# Altium PCB EtherIOv3_1.PcbDoc (part 1 of 2)
Units mil, origin at the board's own origin, x right, y up, seen from the top; angles counter-clockwise.
Board outline 4380 x 2505 mil, 2 copper layers (Top Layer, Bottom Layer), stack 63.824 mil thick; 108 components, 133 nets, 516 pads, 209 vias.
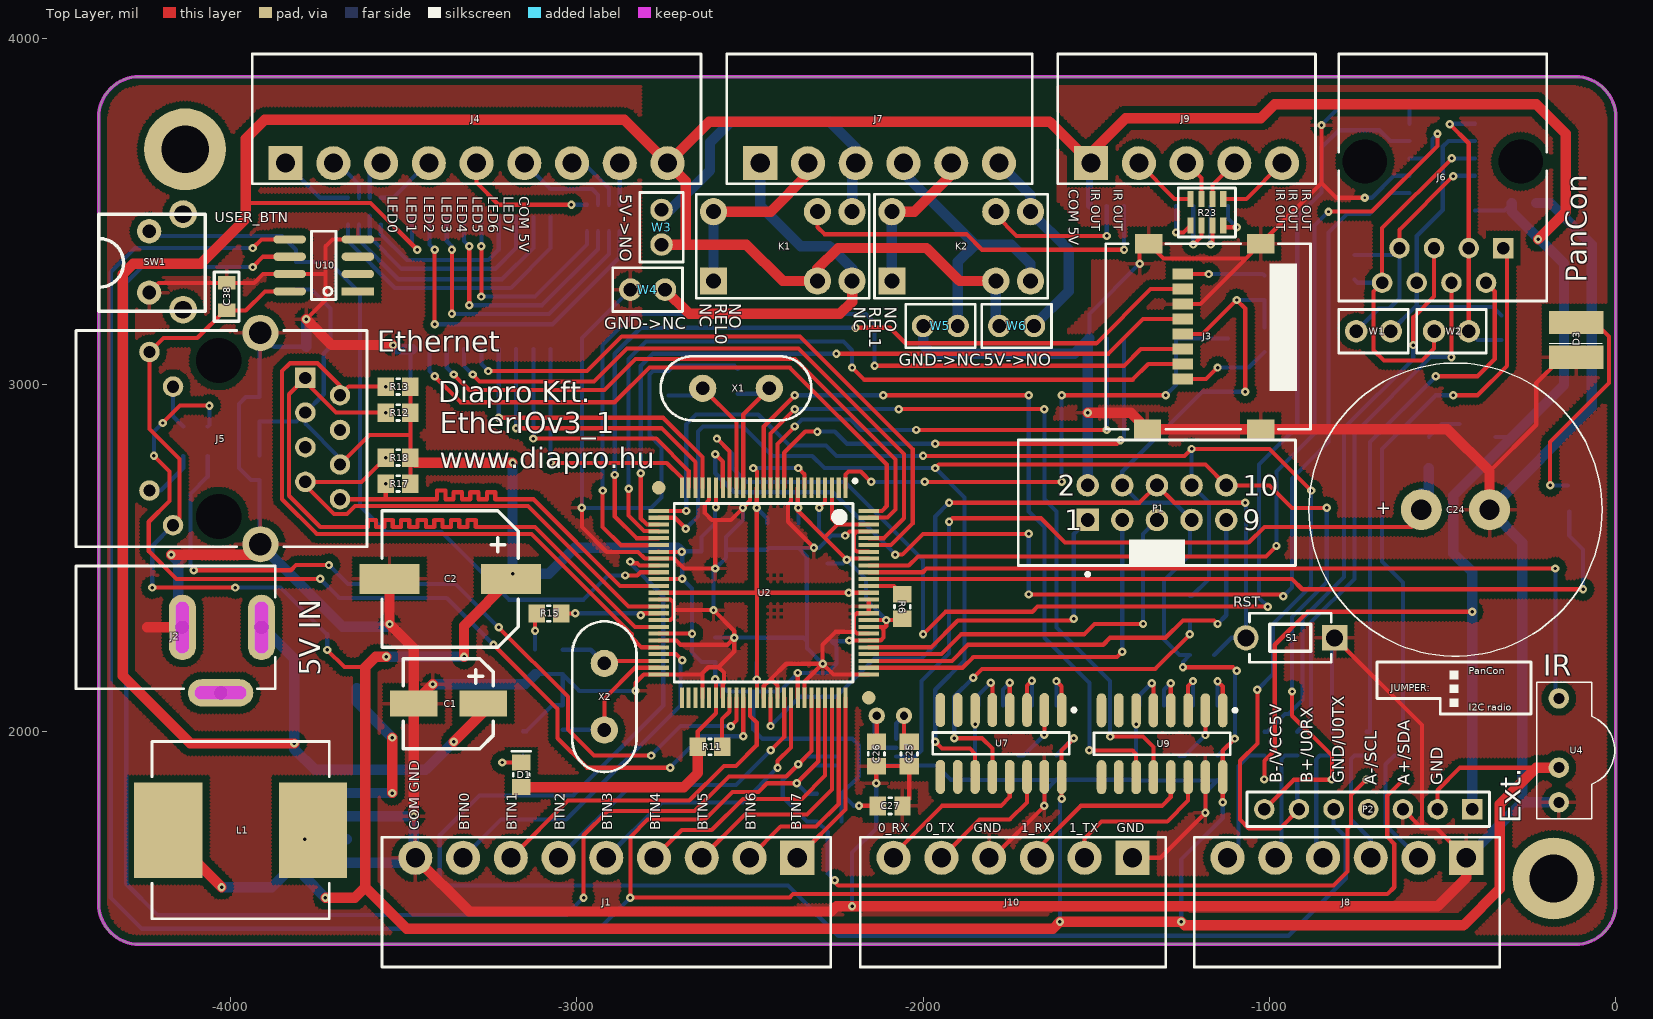
[diagram p0: Top Layer view]
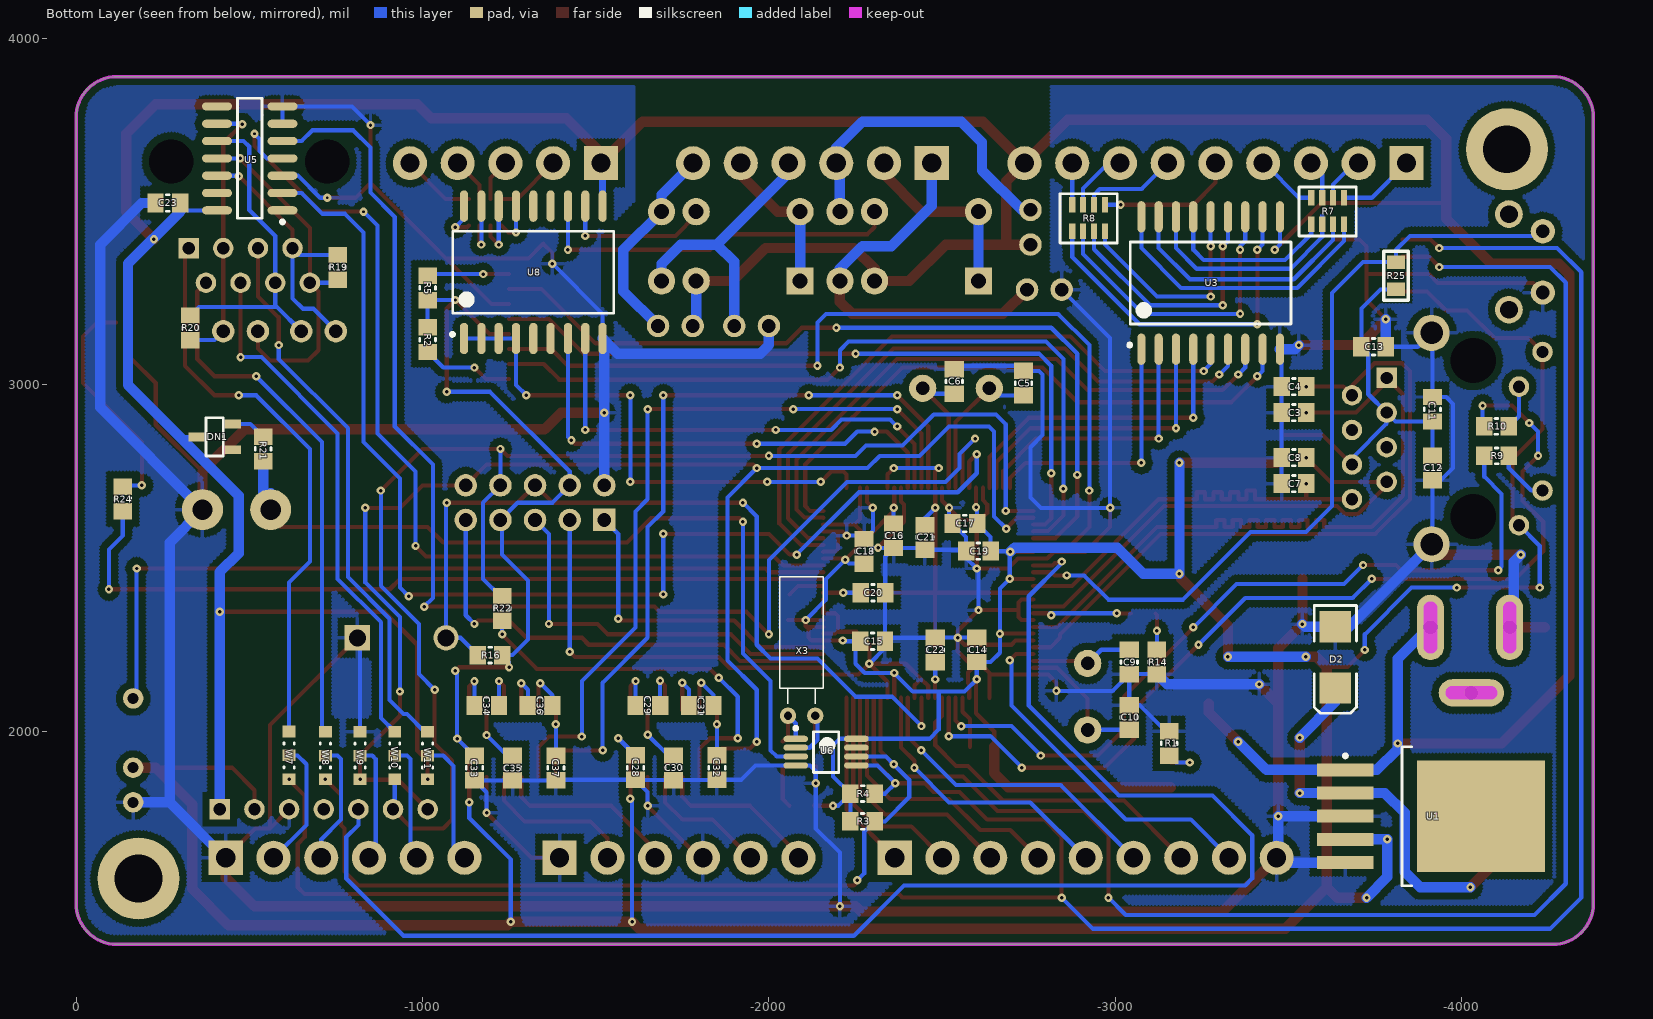
[diagram p1: Bottom Layer view, seen from below]

## Layer stack, top to bottom
Top Layer: signal copper 1.4
Dielectric: core 61.0236, FR-4, Dk 4.8
Bottom Layer: signal copper 1.4

## Board outline
-4380,1503.11 -4380,3771.89 cw(c-4261.89,3771.89) -4261.89,3890 -118.11,3890 cw(c-118.11,3771.89) 0,3771.89 0,1503.11 cw(c-118.11,1503.11) -118.11,1385 -4261.89,1385 cw(c-4261.89,1503.11)

## Design rules (kind name [scope] priority, off if disabled: settings)
Clearance Clearance_to_uc [All vs (InNamedPolygon('BottomLayer-GND'))  or (InNamedPolygon('Top Layer-GND'))] p1: gap=20
Clearance [Not OnLayer('Keep-Out Layer') vs Not OnLayer('Keep-Out Layer')] p2: gap=7
HoleSize [All] p1: absolutevalues=TRUE maxlimit=140 minlimit=1 maxpercent=80.000 minpercent=20.000
MinimumSolderMaskSliver [All] p1: minsoldermaskwidth=1
PolygonConnect [All] p1: connectstyle=Relief reliefconductorwidth=10 reliefentries=4 polygonreliefangle="90 Angle"
RoutingVias [All] p1: holewidth=8 width=24 viastyle="Through Hole" minholewidth=8 minwidth=24 maxholewidth=8 maxwidth=24
SilkscreenOverComponentPads [All] p1: minsilkscreentomaskgap=0
SolderMaskExpansion [All] p1: expansion=4
Width Width_Power [(InNet('NetU1_5') OR InNet('NetU1_18'))] p1: maxlimit=50 minlimit=10 preferedwidth=25
Width [All] p2: maxlimit=30 minlimit=8 preferedwidth=12
25 further rules are at their usual default settings.

## Classes and differential pairs
component class EtherIOv3_1: C1 C2 C3 C4 C5 C6 C7 C8 C9 C10 C11 C12 C13 C14 C15 C16 C17 C18 C19 C20 C21 C22 C38 D1 D2 D3 J1 J2 J3 J4 J5 L1 P1 R1 R2 R3 R4 R5 R6 R7 R8 R9 R10 R11 R12 R13 R14 R15 R16 R17 R18 R24 R25 S1 SW1 U1 U2 U3 U4 U10 X1 X2

## Components (designator, comment, footprint, x,y, rotation, side; value= is the part's Value field where it differs from the comment)
C1 "100uF_25V" "ELECTROLIT CAP F80" -3370,2080 r0 top
C2 "1000uF_6V3" "ELECTROLIT CAP J10" -3365,2440 r0 top
C3 "CAP" "0805 CAP" -3515.43,2920 r0 bottom
C4 "CAP" "0805 CAP" -3515.43,2995 r0 bottom
C5 "CAP" "0805 CAP" -2735,3005 r270 bottom
C6 "CAP" "0805 CAP" -2535,3010 r270 bottom
C7 "CAP" "0805 CAP" -3515.43,2715 r0 bottom
C8 "CAP" "0805 CAP" -3515.43,2790 r0 bottom
C9 "CAP" "0805 CAP" -3040,2200 r90 bottom
C10 "CAP" "0805 CAP" -3040,2040 r270 bottom
C11 "CAP" "0805 CAP" -3915,2929.57 r270 bottom
C12 "CAP" "0805 CAP" -3915,2760.43 r270 bottom
C13 "CAP" "0805 CAP" -3745.43,3110 r180 bottom
C14 "CAP" "0805 CAP" -2600,2235.43 r270 bottom
C15 "CAP" "0805 CAP" -2299.57,2260 r0 bottom
C16 "CAP" "0805 CAP" -2360,2564.57 r90 bottom
C17 "CAP" "0805 CAP" -2565.43,2600 r180 bottom
C18 "CAP" "0805 CAP" -2275,2519.57 r270 bottom
C19 "CAP" "0805 CAP" -2604.57,2520 r180 bottom
C20 "CAP" "0805 CAP" -2300.43,2400 r0 bottom
C21 "CAP" "0805 CAP" -2450,2559.57 r90 bottom
C22 "CAP" "0805 CAP" -2480,2234.57 r270 bottom
C23 "CAP" "0805 CAP" -265,3525 r0 bottom
C24 "ELKO" Goldcap_1F -463.43,2640 r180 top
C25 "CAP" "0805 CAP" -2040,1935 r90 top
C26 "CAP" "0805 CAP" -2135,1935 r90 top
C27 "CAP" "0805 CAP" -2095,1785 r0 top
C28 "CAP" "0805 CAP" -1615,1895.43 r270 bottom
C29 "CAP" "0805 CAP" -1650.43,2075 r0 bottom
C30 "CAP" "0805 CAP" -1725,1894.57 r270 bottom
C31 "CAP" "0805 CAP" -1804.57,2075 r180 bottom
C32 "CAP" "0805 CAP" -1850,1895.43 r270 bottom
C33 "CAP" "0805 CAP" -1150,1894.57 r270 bottom
C34 "CAP" "0805 CAP" -1185.43,2074.13 r0 bottom
C35 "CAP" "0805 CAP" -1260,1893.7 r270 bottom
C36 "CAP" "0805 CAP" -1339.57,2074.13 r180 bottom
C37 "CAP" "0805 CAP" -1385,1894.57 r270 bottom
C38 "100nF" FP_0805_CAP_125 -4010,3255 r90 top
D1 "PWR" "0805 LED" -3160,1874.57 r90 top
D2 "D Schottky" DSO-C2/X2.3 -3635,2213.58 r270 bottom
D3 "LED_RED" "Osram sideled" -115,3130 r90 top
DN1 "BAR43S" DIODE_SOT23_serial -400,2850 r180 bottom
J1 "BUTTONS" "Euroblock 3.5pitch 9P" -2363.23,1634.96 r180 top
J2 "PWR2.5" KLD-0202 -4445,2300 r0 top
J3 "MicroSD" microSD -1250,3016.69 r90 top
J4 "LEDS" "Euroblock 3.5pitch 9P" -3840,3640 r0 top
J5 "EthernetConnector" LU1T516-43 -4355,2845 r90 top
J6 "RJ45-PanBeam" JACK1.27-2H8B -500,3955 r180 top
J7 "Relays" "Euroblock 3.5pitch 6P" -2470,3640 r0 top
J8 "PB audio IN/Extension" "Euroblock 3.5pitch 6P" -432.2,1635 r180 top
J9 "Infra OUT" "Euroblock 3.5pitch 5P" -1515,3640 r0 top
J10 "RS232" "Euroblock 3.5pitch 6P" -1396.02,1635 r180 top
K1 "REL0" RSY-12 -2405,3300 r90 top
K2 "REL1" RSY-12 -1890,3300 r90 top
L1 "100uH" INDP127127X85N -3970,1715 r0 top
P1 "Header 5X2" IDC2.54-V10D -1325,2660 r0 top
P2 "Extension" HDR1X7 -415,1775 r180 top
R1 "RES" "0805 RES" -3155,1965 r270 bottom
R2 "RES" "0805 RES" -1015,3130.43 r90 bottom
R3 "RES" "0805 RES" -2270.43,1740 r0 bottom
R4 "RES" "0805 RES" -2270.43,1820 r0 bottom
R5 "RES" "0805 RES" -1015,3280 r270 bottom
R6 "RES" "0805 RES" -2060,2360 r270 top
R7 "4x Res Array" "1206 4XRES ARRAY" -3660,3540 r0 bottom
R8 "4x Res Array" "1206 4XRES ARRAY" -2970,3520 r0 bottom
R9 "RES" "0805 RES" -4100.43,2795 r180 bottom
R10 "RES" "0805 RES" -4100,2880 r180 bottom
R11 "RES" "0805 RES" -2615,1955 r180 top
R12 "RES" "0805 RES" -3515.43,2920 r0 top
R13 "RES" "0805 RES" -3515.43,2995 r0 top
R14 "RES" "0805 RES" -3120,2200.43 r90 bottom
R15 "RES" "0805 RES" -3080,2340 r0 top
R16 "RES" "0805 RES" -1195,2220 r180 bottom
R17 "RES" "0805 RES" -3515.43,2715 r0 top
R18 "RES" "0805 RES" -3515.43,2790 r0 top
R19 "RES" "0805 RES" -755,3339.33 r90 bottom
R20 "RES" "0805 RES" -330,3164.76 r90 bottom
R21 "RES" "0805 RES" -540,2815 r270 bottom
R22 "RES" "0805 RES" -1230,2355 r270 bottom
R23 "4x Res Array" "1206 4xRES ARRAY" -1133.5,3536.77 r180 top
R24 "RES" "0805 RES" -135,2670.43 r270 bottom
R25 "10k" FP_0805_RES -3810,3315 r90 bottom
S1 "SW-PB" SPST-2 -940,2270 r180 top
SW1 "SW_tactile_2pin" "BUTTON_6X6 90deg" -4185,3355 r270 top
U1 "TS2576" TO-263-5L -3910,1755 r180 bottom
U2 "LM3S6911-IQC" QFP50P1600X1600X160-100N -2460,2400 r270 top
U3 "ULN2803A" SOIC127P1030X265-18N -3275,3294.06 r90 bottom
U4 "TSOP1736" TSOP17xx -165,1945 r90 top
U5 "MAX491ESD" NSO14_N -501.38,3653.82 r0 bottom
U6 "MCP79411" MSOP8 -2165,1940 r180 bottom
U7 "MAX3232CSE" NSO16_M -1775,1965 r270 top
U8 "ULN2803A" SOIC127P1030X265-18N -1320,3325 r90 bottom
U9 "MAX3232CSE" NSO16_M -1310,1964.13 r270 top
U10 "MB85RC16PNF" DIGITAL_SOIC8 -3730,3345 r180 top
W1 "Jumper" Jumper -700,3154.76 r180 top
W2 "Jumper" Jumper -475,3154.76 r180 top
W3 "Jumper" JUMPER -2755,3455 r270 top
W4 "Jumper" JUMPER -2795,3275 r180 top
W5 "Jumper" JUMPER -1950,3170 r180 top
W6 "Jumper" JUMPER -1730,3170 r180 top
W7 "A+/SDA" "0603 3WAY JUMPER" -615,1965 r270 bottom (schematic designator W11)
W8 "A-/SCL" "0603 3WAY JUMPER" -720,1964.45 r270 bottom
W9 "GND/U0TX" "0603 3WAY JUMPER" -820,1964.45 r270 bottom
W10 "B+/U0RX" "0603 3WAY JUMPER" -920,1964.45 r270 bottom
W11 "B-/VCC5V" "0603 3WAY JUMPER" -1015,1964.45 r270 bottom
X1 "CRYSTAL" CRYSTAL_LOW -2540,2990 r0 top
X2 "CRYSTAL" CRYSTAL_LOW -2920,2100 r270 top
X3 "CRYSTAL" CRYSTAL_MINI -2094.37,2045 r180 bottom

## Footprints (in the part's own frame and the unit in brackets; to place one, negate y for a bottom-side part, rotate by r counter-clockwise, add the part's x,y. Pads: shape width x height; smd on the part's side, far side on the other; paste and mask are expansions set on the pad)
"0603 3WAY JUMPER" [mm] "Chip Resistor, 2-Leads, Body 1,6x0,8mm, IPC Medium Density"
  rect 0.85x0.95 smd: 1(-0.875,0) 2(0.875,0) 3(2.625,0)
  silkscreen extent -0.05,-0.38 1.8,0.38, body extent -0.8,-0.45 2.5,0.45, height 0.55
"0805 CAP" [mm] "Chip Capacitor, 2-Leads, Body 2,0x1,3mm, IPC Medium Density"
  rect 1.2x1.4 smd: 1(-0.9,0) 2(0.9,0)
  silkscreen extent -0.1,-0.6 0.1,0.6, body extent -1.05,-0.67 1.05,0.67, height 1
"0805 LED" [mm] "SMD LED, 2-Leads, Body 2,0x1,3mm, IPC Medium Density"
  rect 1.2x1.35 smd: 1(-0.9,0) 2(0.9,0)
  silkscreen extent -0.1,-0.7 1.73,0.7, body extent -1.05,-0.67 1.05,0.67, height 1
"0805 RES" [mm] "Chip Resistor, 2-Leads, Body 2,0x1,3mm, IPC Medium Density"
  rect 1.2x1.35 smd: 1(-0.9,0) 2(0.9,0)
  silkscreen extent -0.1,-0.58 0.1,0.58, body extent -1.05,-0.67 1.05,0.67, height 1
"1206 4XRES ARRAY" [mm] "Chip Resistor, 2-Leads, Body 3,2x1,6mm, IPC Medium Density"
  rect 0.45x1.15 smd: 1(0,0) 2(0.8,0) 3(1.6,0) 4(2.4,0) 5(2.4,1.95) 6(1.6,1.95) 7(0.8,1.95) 8(0,1.95)
  silkscreen extent -0.9,-0.8 3.3,2.8, body extent -0.6,-0.3 3,2.3, height 0.6
"1206 4xRES ARRAY" [mm] "Chip Resistor, 2-Leads, Body 3,2x1,6mm, IPC Medium Density"
  rect 0.45x1.15 smd: 1(0,0) 2(0.8,0) 3(1.6,0) 4(2.4,0) 5(2.4,1.95) 6(1.6,1.95) 7(0.8,1.95) 8(0,1.95)
  silkscreen extent -0.9,-0.8 3.3,2.8, body extent -0.6,-0.3 3,2.3, height 0.6
"BUTTON_6X6 90deg" [mil]
  round 70 hole 39.37: 1(88.5,-49) 2(-88.5,-49)
  round 80 hole 51: 3(-138,49) 3(138,49)
  silkscreen extent -137,-195 143,112, body extent -168,-199 171,110, height 287
CRYSTAL_LOW [mm]
  round 2 hole 1: 1(-2.44,0) 2(2.44,0)
  silkscreen extent -5.53,-2.35 5.53,2.35, body extent -5.6,-2.4 5.6,2.4, height 3.7
CRYSTAL_MINI [mm] "Furatszerelt D-3.1x8.2"
  round 1.2 hole 0.6: 1(-1,0) 2(1,0)
  silkscreen extent -1.6,0.89 1.6,10.2, body extent -1.5,2.1 1.49,10.1, height 3
DIGITAL_SOIC8 [mm]
  rect 2.4x0.6 smd: 1(-2.5,1.905)
  oval 2.4x0.6 smd: 2(-2.5,0.635) 3(-2.5,-0.635) 4(-2.5,-1.905) 5(2.5,-1.905) 6(2.5,-0.635) 7(2.5,0.635) 8(2.5,1.905)
  silkscreen extent -0.9,-2.5 0.9,2.5, body extent -3.03,-2.5 3.03,2.5, height 1.9
DIODE_SOT23_serial [mm] "SOT23-3 tok"
  rect 1.2x0.65 smd: A(1.327,-0.95) COM(-1.327,0) K(1.327,0.95)
  silkscreen extent -0.64,-1.4 0.64,1.4, body extent -1.27,-1.46 1.27,1.46, height 0.97
DSO-C2/X2.3 [mm] "DO-214-AA/SMB; 2 C-Bend Leads; Body 5.3 x 3.6 mm, inc. leads (LxW)"
  rect 2.3x2.3 smd: 1(-2.25,0) 2(2.25,0)
  silkscreen extent -3.8,-1.55 4.1,1.55
"ELECTROLIT CAP F80" [mm]
  rect 3.5x1.9 smd: 1(-2.55,0) 2(2.55,0)
  silkscreen extent -3.3,-3.3 3.3,3.3, body extent -3.3,-3.3 3.3,3.3, height 7.6
"ELECTROLIT CAP J10" [mm]
  rect 4.4x2.2 smd: 1(-4.45,0) 2(4.45,0)
  silkscreen extent -5,-5 5,5, body extent -5,-5 5,5, height 10
"Euroblock 3.5pitch 5P" [mm] "3.5 mm pitch 5P connector"
  rect 2.5x2.5 hole 1.4: 1(0,0)
  round 2.5 hole 1.4 mask+0.102: 2(3.5,0) 3(7,0) 4(10.5,0) 5(14,0)
  silkscreen extent -2.45,-1.5 16.45,8, body extent -2.45,-1.5 16.45,8, height 7.2
"Euroblock 3.5pitch 6P" [mm] "3.5 mm pitch 6P connector"
  rect 2.5x2.5 hole 1.4: 1(0,0)
  round 2.5 hole 1.4 mask+0.102: 2(3.5,0) 3(7,0) 4(10.5,0) 5(14,0) 6(17.5,0)
  silkscreen extent -2.45,-1.5 19.95,8, body extent -2.45,-1.5 19.95,8, height 7.2
"Euroblock 3.5pitch 9P" [mm] "3.5 mm pitch 9P connector"
  rect 2.5x2.5 hole 1.4: 1(0,0)
  round 2.5 hole 1.4 mask+0.102: 2(3.5,0) 3(7,0) 4(10.5,0) 5(14,0) 6(17.5,0) 7(21,0) 8(24.5,0) 9(28,0)
  silkscreen extent -2.45,-1.5 30.45,8, body extent -2.45,-1.5 30.45,8, height 7.2
FP_0805_CAP_125 [mm] "0805 kapacitás YAGEO/NIC 1.25 mm magas"
  rect 1x1.3 smd: 1(-1,0) 2(1,0)
  silkscreen extent -1.8,-0.9 1.8,0.9, body extent -1,-0.64 1.03,0.64, height 1.25
FP_0805_RES [mm] "0805 ellenállás"
  rect 1x1.3 smd: 1(-1,0) 2(1,0)
  silkscreen extent -1.8,-0.9 1.8,0.9, body extent -1,-0.62 1,0.63, height 0.62
Goldcap_1F [mm] "Goldcap 1F 21.5x8mm"
  round 3 hole 1.5: 1(-2.5,0) 2(2.5,0)
  silkscreen extent -10.75,-10.75 10.75,10.75, body extent -10.72,-10.7 10.7,10.76, height 8
HDR1X7 [mm] "Connector; Header; 7 Position"
  rect 1.5x1.5 hole 0.9: 1(0,0)
  round 1.5 hole 0.9: 2(2.54,0) 3(5.08,0) 4(7.62,0) 5(10.16,0) 6(12.7,0) 7(15.24,0)
  silkscreen extent -1.27,-1.27 16.51,1.27
IDC2.54-V10D [mm] "Connector; IDC, Low Profile Male Header, Thru-Hole; 10 Position; Vertical; Pitch 2.54 mm; Body 20.32 x 9.2 x 9.45 mm (LxWxH)"
  rect 1.65x1.65 hole 1: 1(-5.08,-1.27)
  round 1.65 hole 1: 2(-5.08,1.27) 3(-2.54,-1.27) 4(-2.54,1.27) 5(0,-1.27) 6(0,1.27) 7(2.54,-1.27) 8(2.54,1.27) 9(5.08,-1.27) 10(5.08,1.27)
  silkscreen extent -10.16,-5.37 10.16,4.6, body extent -10.16,-4.6 10.16,4.6, height 9.45
INDP127127X85N [mm] "Precision Wire Wound Inductor, 2-Leads, Body 12,7x12,7mm, IPC Medium Density"
  rect 5x7 smd: 1(-5.3,0) 2(5.3,0)
  silkscreen extent -6.5,-6.5 6.5,6.5, body extent -6.5,-6.5 6.5,6.5, height 8.5
JACK1.27-2H8B [mm] "Connector; PCB Jack, Thru-Hole; 1-Port, 8 Positions, 8 Loaded; Unshielded without Lightpipes; Right Angle"
  rect 1.5x1.5 hole 0.9: 1(-4.445,14.23)
  round 1.5 hole 0.9: 2(-3.175,16.77) 3(-1.905,14.23) 4(-0.635,16.77) 5(0.635,14.23) 6(1.905,16.77) 7(3.175,14.23) 8(4.445,16.77)
  round 2.95 hole 3.25 unplated: MH1(-5.715,7.88) MH2(5.715,7.88)
  silkscreen extent -7.62,0 7.62,18.1, body extent -7.62,0 7.62,18.1, height 8.65
Jumper [mm] "Jumper, 2.54 pitch"
  round 1.65 hole 1: 1(-1.27,0) 2(1.27,0)
  silkscreen extent -2.55,-1.6 2.55,1.6, body extent -2.54,-1.6 2.54,1.6, height 8.54
JUMPER [mm] "Jumper, 2.54 pitch"
  round 1.65 hole 1: 1(-1.27,0) 2(1.27,0)
  silkscreen extent -2.55,-1.6 2.55,1.6, body extent -2.54,-1.6 2.54,1.6, height 8.54
KLD-0202 [mm] "DC Power Jack, 2.5mm, KLD Series, PCB Mount"
  oval 2x4.8 hole 1: 1(13.6,0) 2(7.8,0)
  oval 4.8x2 hole 1: 3(10.6,-4.8)
  Keep-Out Layer lines w1: 7.8,-1.4 7.8,1.4 ; 9.2,-4.8 12,-4.8 ; 13.6,-1.4 13.6,1.4
  silkscreen extent 0,-4.5 14.6,4.5, body extent 0,-4.5 14.6,4.5, height 10.7
LU1T516-43 [mm] "Connector; PCB Jack, Thru-Hole; 1-Port, 8 Positions, 8 Loaded; Shielded without Lightpipes; Right Angle"
  round 2.65 hole 1.651: MH1(7.747,-11.227) MH2(-7.747,-11.227)
  round 2.95 hole 3.302 unplated: MH3(5.715,-8.179) MH4(-5.715,-8.179)
  rect 1.5x1.5 hole 0.9: P1(4.445,-14.529)
  round 1.5 hole 0.9: P2(3.175,-17.069) P3(1.905,-14.529) P4(0.635,-17.069) P5(-0.635,-14.529) P6(-1.905,-17.069) P7(-3.175,-14.529) P8(-4.445,-17.069) P9(6.35,-3.099) P10(3.81,-4.826) P11(-3.81,-3.099) P12(-6.35,-4.826)
  silkscreen extent -7.92,-19.05 7.92,2.29, body extent -7.87,-19.05 7.87,2.29, height 12.09
microSD [mm]
  rect 0.8x1.5 smd: 1(0,0) 2(1.1,0) 3(2.2,0) 4(3.3,0) 5(4.4,0) 6(5.5,0) 7(6.6,0) 8(7.7,0)
  rect 1.45x2 smd: 9(-3.675,2.6) 10(9.925,2.5) 11(-3.675,-5.7) 12(9.925,-5.7)
  Top Overlay keep-out region: -0.888,-8.349 8.462,-8.349 8.462,-6.349 -0.888,-6.349
  silkscreen extent -3.67,-9.35 9.92,5.65
MSOP8 [mm] "MSOP, 8-Leads, Body 3,0x3,0mm (max), Pitch 0,65mm, IPC Medium Density"
  oval 1.8x0.45 smd: 1(-2.225,0.975) 2(-2.225,0.325) 3(-2.225,-0.325) 4(-2.225,-0.975) 5(2.225,-0.975) 6(2.225,-0.325) 7(2.225,0.325) 8(2.225,0.975)
  silkscreen extent -2.35,-1.5 0.92,1.87, body extent -1.52,-1.53 1.53,1.52, height 1.1
NSO14_N [mm] "SOIC, 14-Leads, Body 8.7x3.9mm, Pitch 1.27mm, IPC Medium Density"
  oval 2.2x0.6 smd: 1(-2.4,3.81) 2(-2.4,2.54) 3(-2.4,1.27) 4(-2.4,0) 5(-2.4,-1.27) 6(-2.4,-2.54) 7(-2.4,-3.81) 8(2.4,-3.81) 9(2.4,-2.54) 10(2.4,-1.27) 11(2.4,0) 12(2.4,1.27) 13(2.4,2.54) 14(2.4,3.81)
  silkscreen extent -2.52,-4.4 0.9,4.78, body extent -2,-4.38 2,4.38, height 1.75
NSO16_M [mm] "SOIC, 16-Leads, Body 9.9x3.9mm, Pitch 1.27mm, IPC Low Density"
  oval 2.5x0.7 smd: 1(-2.45,4.445) 2(-2.45,3.175) 3(-2.45,1.905) 4(-2.45,0.635) 5(-2.45,-0.635) 6(-2.45,-1.905) 7(-2.45,-3.175) 8(-2.45,-4.445) 9(2.45,-4.445) 10(2.45,-3.175) 11(2.45,-1.905) 12(2.45,-0.635) 13(2.45,0.635) 14(2.45,1.905) 15(2.45,3.175) 16(2.45,4.445)
  silkscreen extent -2.57,-5 0.8,5.47, body extent -2,-5 2,5, height 1.75
"Osram sideled" [mil]
  rect 67x157.48 smd paste+0: A(50,0)
  rect 67x157.48 smd: K(-50,0)
  silkscreen extent -10,-76 -10,78, body extent -77,-79 81,69, height 158
QFP50P1600X1600X160-100N [mm] "QFP,0.50mm pitch,square;25 pin X 25 pin,14.00mm X 14.00mm X 1.60mm H body"
  rect 1.5x0.3 smd: 1(-7.7,6) 2(-7.7,5.5) 3(-7.7,5) 4(-7.7,4.5) 5(-7.7,4) 6(-7.7,3.5) 7(-7.7,3) 8(-7.7,2.5) 9(-7.7,2) 10(-7.7,1.5) 11(-7.7,1) 12(-7.7,0.5) 13(-7.7,0) 14(-7.7,-0.5) 15(-7.7,-1) 16(-7.7,-1.5) 17(-7.7,-2) 18(-7.7,-2.5) 19(-7.7,-3) 20(-7.7,-3.5) 21(-7.7,-4) 22(-7.7,-4.5) 23(-7.7,-5) 24(-7.7,-5.5) 25(-7.7,-6) 51(7.7,-6) 52(7.7,-5.5) 53(7.7,-5) 54(7.7,-4.5) 55(7.7,-4) 56(7.7,-3.5) 57(7.7,-3) 58(7.7,-2.5) 59(7.7,-2) 60(7.7,-1.5) 61(7.7,-1) 62(7.7,-0.5) 63(7.7,0) 64(7.7,0.5) 65(7.7,1) 66(7.7,1.5) 67(7.7,2) 68(7.7,2.5) 69(7.7,3) 70(7.7,3.5) 71(7.7,4) 72(7.7,4.5) 73(7.7,5) 74(7.7,5.5) 75(7.7,6)
  rect 0.3x1.5 smd: 26(-6,-7.7) 27(-5.5,-7.7) 28(-5,-7.7) 29(-4.5,-7.7) 30(-4,-7.7) 31(-3.5,-7.7) 32(-3,-7.7) 33(-2.5,-7.7) 34(-2,-7.7) 35(-1.5,-7.7) 36(-1,-7.7) 37(-0.5,-7.7) 38(0,-7.7) 39(0.5,-7.7) 40(1,-7.7) 41(1.5,-7.7) 42(2,-7.7) 43(2.5,-7.7) 44(3,-7.7) 45(3.5,-7.7) 46(4,-7.7) 47(4.5,-7.7) 48(5,-7.7) 49(5.5,-7.7) 50(6,-7.7) 76(6,7.7) 77(5.5,7.7) 78(5,7.7) 79(4.5,7.7) 80(4,7.7) 81(3.5,7.7) 82(3,7.7) 83(2.5,7.7) 84(2,7.7) 85(1.5,7.7) 86(1,7.7) 87(0.5,7.7) 88(0,7.7) 89(-0.5,7.7) 90(-1,7.7) 91(-1.5,7.7) 92(-2,7.7) 93(-2.5,7.7) 94(-3,7.7) 95(-3.5,7.7) 96(-4,7.7) 97(-4.5,7.7) 98(-5,7.7) 99(-5.5,7.7) 100(-6,7.7)
  round 1 smd: 101(-7.7,-7.7) 102(7.7,7.7)
  Top Layer pour cut-out: 154 vertices and 0 holes, not listed, extent -8.7,-8.7 -6.7,-6.7
  Top Layer pour cut-out: 154 vertices and 0 holes, not listed, extent 6.7,6.7 8.7,8.7
  silkscreen extent -8.32,-6.55 6.55,6.83
RSY-12 [mm]
  round 2 hole 1.1: COIL1(0,-2.54) COIL2(5.08,-2.54) COM2(5.08,5.08) NC(0,-5.08) NO(5.08,-5.08)
  rect 2x2 hole 1.1: COM1(0,5.08)
  silkscreen extent -1.27,-6.35 6.35,6.35, body extent -1.27,-6.35 6.35,6.35, height 10.2
SOIC127P1030X265-18N [mm] "SOIC, 18-Leads, Body 11,8x7,6mm (max), Pitch 1,27mm, IPC Medium Density"
  oval 2.3x0.6 smd: 1(-4.85,5.08) 2(-4.85,3.81) 3(-4.85,2.54) 4(-4.85,1.27) 5(-4.85,0) 6(-4.85,-1.27) 7(-4.85,-2.54) 8(-4.85,-3.81) 9(-4.85,-5.08) 10(4.85,-5.08) 11(4.85,-3.81) 12(4.85,-2.54) 13(4.85,-1.27) 14(4.85,0) 15(4.85,1.27) 16(4.85,2.54) 17(4.85,3.81) 18(4.85,5.08)
  silkscreen extent -4.67,-5.9 3,6.06, body extent -3.8,-5.87 3.8,5.87, height 2.65
SPST-2 [mm] "Circuit Breaker; 2 Leads"
  rect 1.85x1.85 hole 1.25: 1(-3.25,0)
  round 1.85 hole 1.25: 2(3.25,0)
  silkscreen extent -3,-1.8 3,1.8
TO-263-5L [mm] "D2-PAK, 6-Pads, Body 8,3x10,2mm (max), IPC Medium Density"
  rect 4.15x0.95 smd: 1(-6.25,3.4) 2(-6.25,1.7) 3(-6.25,0) 4(-6.25,-1.7) 5(-6.25,-3.4)
  rect 9.4x8.2 smd: 6(3.7,0)
  silkscreen extent -6.38,-5.1 -1.4,5.1, body extent -2.1,-5.1 6.18,5.1, height 4.57
TSOP17xx [mm] "TSOP17xx IR Receiver"
  round 1.5 hole 0.8: 1(-3.81,0) 2(-1.27,0) 3(3.81,0)
  silkscreen extent -5,-4.09 5,1.6, body extent -5,-4.1 5,1.6, height 13.3

## Part data
C1 C2: "SMD Electrolit Capacitor"
C3 C4 C5 C6 C7 C8 C9 C10 C11 C12 C13 C14 C15 C16 C17 C18 C19 C20 C21 C22 C23 C25 C26 C27 C28 C29 C30 C31 C32 C33 C34 C35 C36 C37: "Capacitor"
C24: "Electrolit Capacitor"
C38: library part Cap, "Capacitor"
D1: library part LED2, "Typical RED, GREEN, YELLOW, AMBER GaAs LED"
D2: "Schottky Diode"
D3: library part LED_R, "Typical LED"
J1 J4: library part "Euroblock 9P connector"
J2: "Low Voltage Power Supply Connector"
J6: "PanBeam - RS485 + 2xAudio"
J7 J8 J10: library part "Euroblock 6P connector"
J9: library part "Euroblock 5P connector"
K1 K2: library part Relay, "SPDT Relay"
L1: library part Inductor, "Inductor"
P1: "Header, 5-Pin, Dual row"
P2: library part "Header 7", "Header, 7-Pin"
R1 R2 R3 R4 R5 R6 R9 R10 R11 R12 R13 R14 R15 R16 R17 R18 R19 R20 R21 R22 R24: "Resistor"
R7 R8 R23: "Isolated Resistor Network"
R25: library part Res3, "Resistor"
S1: "Switch"
U1: "Step Down DC-DC Converter"
U2: library part LM3S6611-IQC, "Stellaris ARM Cortex-M3 Microcontroller"
U3 U8: "8xDarlington Driver"
U4: library part TSOP17xx, "IR Receiver, 3-Pin"
U5: "Low-Power, Slew-Rate-Limited RS-485/RS-422 Transceiver"
U6: "MCP79411 I2C RTCC + MAC"
U7 U9: "3.0V TO 5.5V, Low-Power, up to 1Mbps, True RS-232 Transceiver Using Four 0.1µF External Capacitor"
U10: "MB85RC16PNF I2C MEM"
W1 W2 W3 W4 W5 W6: "Jumper Wire"
W7 W8 W9 W10 W11: library part Jumper_3way, "Jumper Wire"
X1 X2 X3: "Crystal"

## Free pads (board coordinates)
  round 236.22 hole 137.8: 0(-4130,3680) 0(-180,1575)

## Via types
v1: diameter 24, hole 10, Top Layer to Bottom Layer, 206 vias
v2: diameter 24, hole 8, Top Layer to Bottom Layer, 3 vias

## Nets (pads, with @x,y where several pads share a name; then routed paths per layer and width w, separated by ;. In a path a pad name is that pad's centre, name@x,y a point inside that pad or via, vN(x,y) a via of type N, cw(c..) or ccw(c..) an arc to the next point about the centre after c; other vN are vias at no path point)
A+: J6.1 W7.1 | length 1643.7
  Top Layer w12: v1(-470,2970) -400,2970 -315,3055 -315,3384.76 J6.1@-325,3394.76
  Bottom Layer w12: W7.1@-615,1999.45 -615,2430 -675,2490 -675,2815 -520,2970 v1(-470,2970)
A+/SDA: J8.2 W7.2 | length 377
  Bottom Layer w12: W7.2@-615,1930.55 -639.45,1930.55 -665,1905 -665,1730 J8.2@-570,1635 J8.2@-565,1640
A-: J6.2 W8.1 | length 1535
  Top Layer w12: v1(-520,3025) -400,3025 -350,3075 -350,3269.76 J6.2@-375,3294.76
  Bottom Layer w12: W8.1@-720,1998.9 -711.1,1998.9 -710,2000 -710,2835 v1(-520,3025)
A-/SCL: J8.3 W8.2 | length 357.8
  Bottom Layer w12: W8.2@-720,1930 -755,1930 -765,1920 -765,1745 -707.8,1687.8 J8.3@-707.8,1635
AN2: P2.4
B+: J6.4 W10.1 | length 1515.3
  Top Layer w12: v1(-475,3080) J6.4@-475,3294.76
  Bottom Layer w12: W10.1@-920,1998.9 -880,2038.9 -880,2315 -755,2440 -755,2860 -535,3080 v1(-475,3080)
B+/U0RX: J8.5 W10.2 | length 341.8
  Bottom Layer w12: J8.5@-983.39,1635 -965,1653.39 -965,1920 -955,1930 W10.2@-920,1930
B-: J6.5 W11.1 | length 1609.9
  Top Layer w12: v1(-585,3115) -585,3195 -525,3255 J6.5@-525,3394.76
  Bottom Layer w12: W11.1@-1015,1998.9 -1006.1,1998.9 -955,2050 -945,2050 -905,2090 -905,2325 -785,2445 -785,2875 -585,3075 v1(-585,3115)
B-/VCC5V: J8.6 W11.2 | length 365.3
  Bottom Layer w12: J8.6@-1121.18,1635 -1090,1666.18 -1090,1900 -1060,1930 W11.2@-1015,1930
BTN0: J1.8 U2.47 | length 1017.7
  Top Layer w12: U2.47@-2763.15,2222.83 -2712.83,2222.83 v1(-2695,2205)
  Bottom Layer w12: J1.8@-3327.8,1634.96 -3217.76,1745 -3030,1745 -2700,2075 -2700,2200 v1(-2695,2205)
BTN1: J1.7 U2.61 | length 989.5
  Top Layer w12: J1.7@-3190,1634.96 -3024.96,1800 -2675,1800 -2575,1900 -2540,1900 -2480,1960 -2480,2025 -2499.37,2044.37 U2.61@-2499.37,2096.85
BTN2: J1.6 U2.66 | length 908.7
  Top Layer w12: v1(-2440,1945) -2400.94,1984.06 U2.66@-2400.94,2096.85
  Bottom Layer w12: J1.6@-3052.2,1634.96 -2842.17,1845 -2540,1845 v1(-2440,1945)
BTN3: J1.5 U2.67 | length 820
  Top Layer w12: v1(-2420,1895) -2420,1915 -2381.26,1953.74 U2.67@-2381.26,2096.85
  Bottom Layer w12: J1.5@-2914.41,1634.96 -2754.37,1795 -2520,1795 v1(-2420,1895)
BTN4: J1.4 U2.72 | length 816.7
  Top Layer w12: J1.4@-2776.61,1634.96 -2696.58,1715 -2610,1715 -2520,1805 -2350,1805 -2282.83,1872.17 U2.72@-2282.83,2096.85
BTN5: J1.3 U2.73 | length 722.2
  Top Layer w12: J1.3@-2638.82,1634.96 -2513.78,1760 -2335,1760 -2263.15,1831.85 U2.73@-2263.15,2096.85
BTN6: J1.2 U2.74 | length 628.2
  Top Layer w12: J1.2@-2501.02,1634.96 -2410.98,1725 -2309.13,1725 -2243.46,1790.67 U2.74@-2243.46,2096.85
BTN7: J1.1 U2.75 | length 519.7
  Top Layer w12: J1.1@-2363.23,1634.96 -2223.78,1774.41 U2.75@-2223.78,2096.85
GND: C1.1 C2.1 C3.2 C4.2 C5.1 C6.1 C7.2 C8.2 C9.1 C10.1 C11.1 C12.2 C13.2 C14.1 C15.1 C16.1 C17.1 C18.1 C19.1 C20.1 C21.1 C22.1 C23.2 C24.1 C25.1 C26.1 C27.2 C28.2 C30.2 C32.2 C33.2 C35.2 C37.2 C38.2 D2.1 D3.K J1.9 J2.2 J3.6 J3.9 J3.10 J3.11 J3.12 J5.MH1 J5.MH2 J8.1 J10.1 J10.4 P1.2 P2.3 R1.1 R14.1 S1.1 SW1.1 U1.3 U1.5 U2.4 U2.9 U2.15 U2.21 U2.33 U2.39 U2.42 U2.45 U2.50 U2.54 U2.57 U2.63 U2.65 U2.69 U2.76 U2.82 U2.85 U2.86 U2.87 U2.94 U2.97 U3.9 U4.1 U5.3 U5.6 U5.7 U6.4 U7.15 U8.9 U9.15 U10.4 U10.7 W4.2 W5.2 W9.1 | length 26094.7
  Top Layer w12: SW1.1@-4234,3266.5 -4206.13,3294.37 C38.2@-4010,3294.37 -3930.63,3294.37 -3905,3320 U10.7@-3828.43,3320 -3725,3320 ; v1(-3780.87,3189.13) -3725,3245 -3725,3320 ; U10.4@-3631.57,3420 -3705,3420 -3725,3400 -3725,3320 ; v1(-2985,2645) -2985,2590 -2913.02,2518.02 -2823.02,2518.02 -2803.43,2498.43 U2.33@-2763.15,2498.43 -2718.43,2498.43 -2690,2470 v1(-2600,2470) -2600,2610 ; v1(-2830,2116.85) -2830,2140 -2806.22,2163.78 U2.50@-2763.15,2163.78 -2641.22,2163.78 -2637.17,2167.83 ; U2.45@-2763.15,2262.2 -2712.2,2262.2 -2700,2250 -2565,2250 v1(-2545,2270) ; U2.42@-2763.15,2321.26 -2729.02,2321.26 -2720.62,2329.65 -2720.62,2350 ; U2.39@-2763.15,2380.32 -2729.02,2380.32 -2720.62,2371.92 -2720.62,2350 ; U2.54@-2637.17,2096.85 -2637.17,2167.83 ; U2.21@-2617.48,2703.15 -2617.48,2667.52 -2630,2655 -2630,2630 -2610,2610 -2600,2610 ; U2.57@-2578.11,2096.85 -2578.11,2136.53 -2575,2139.64 -2575,2170 -2590,2185 ; U2.15@-2499.37,2703.15 -2499.37,2665.63 v1(-2520,2645) -2555,2610 -2600,2610 ; U2.63@-2460,2096.85 -2460,2130.98 -2451.61,2139.38 -2450.62,2139.38 -2438.88,2151.12 ; U2.65@-2420.63,2096.85 -2420.63,2132.86 -2438.88,2151.12 ; U2.9@-2381.26,2703.15 -2381.26,2663.74 -2390,2655 -2390,2605 v1(-2315,2530) ; U2.69@-2341.89,2096.85 -2341.89,2143.11 v1(-2290,2195) ; v1(-2300,2645) -2282.83,2662.17 U2.4@-2282.83,2703.15 ; v1(-2225,2565) -2212.83,2577.17 -2190.98,2577.17 ; -2202.44,2287.2 -2252.8,2287.2 -2290,2250 v1(-2290,2195) ; U2.76@-2156.85,2163.78 -2258.78,2163.78 v1(-2290,2195) ; U2.82@-2156.85,2281.89 -2190.98,2281.89 -2199.38,2290.28 -2199.38,2332.55 -2190.98,2340.94 U2.85@-2156.85,2340.94 U2.86@-2156.85,2360.63 U2.87@-2156.85,2380.32 ; U2.94@-2156.85,2518.11 -2157.54,2518.8 -2191.67,2518.8 -2199.38,2526.51 -2199.38,2568.77 -2190.98,2577.17 ; U2.97@-2156.85,2577.17 -2190.98,2577.17 ; v1(-2135,1850) C26.1@-2135,1899.57 C25.1@-2040,1899.57 -2040,1804.57 C27.2@-2059.57,1785 ; J10.4@-1809.41,1635 -1800,1635 v1(-1650,1785) U7.15@-1650,1868.54 ; J10.1@-1396.02,1635 -1315,1635 v1(-1185,1765) U9.15@-1185,1867.68 ; v1(-1375,3350) -1375,3380.87 J3.10@-1348.43,3407.44 -1305.98,3365 -1068.03,3365 ; J3.6@-1250,3233.23 -1199.8,3233.23 -1068.03,3365 ; v1(-850,3750) -850,3583.03 ; S1.1@-812.05,2270 -560,2017.95 -560,1720 ; v2(-725,3540) -806.97,3540 -850,3583.03 ; P2.3@-615,1775 -560,1720 ; J8.1@-432.2,1635 -517.2,1720 -560,1720 ; -365,2750 -230,2885 -230,3005 D3.K@-160,3075 ; -2720.62,2350 v1(-2605,2350) -2545,2290 v1(-2545,2270) ; -2637.17,2167.83 -2620,2185 -2590,2185 ; -2590,2185 -2545,2230 v1(-2545,2270) ; -2438.88,2151.12 -2395,2195 v1(-2290,2195) ; -1068.03,3365 J3.12@-1025.59,3407.44 -850,3583.03
  Top Layer w30: -4240,2300 J2.2@-4137.91,2300 ; v1(-4170,2510) -3943,2510 J5.MH2@-3913,2540 J5.MH2@-3913,2536.72 ; v1(-3780.87,3189.13) -3706.73,3115 v1(-3530,3115) ; C2.1@-3540.2,2440 -3540.2,2309.8 v1(-3540,2309.61) -3470.39,2240 C1.1@-3470.39,2080 ; v1(-3470,1755) -3470.39,1755.39 C1.1@-3470.39,2080 ; J1.9@-3465.59,1634.96 -3310.63,1480 -2265,1480 -2250,1495 -515,1495 -432.2,1577.8 J8.1@-432.2,1635 ; v1(-3415,2135.39) C1.1@-3470.39,2080 ; v1(-1525,2920) -1400.35,2920 J3.9@-1352.36,2872.01 J3.11@-1025.59,2872.01 -487.01,2872.01 -365,2750 C24.1@-365,2640
  Bottom Layer w12: J5.MH2@-3913,2540 -3915,2542 C12.2@-3915,2725 -3940,2725 -3975,2760 -3975,2945 -3955,2965 C11.1@-3915,2965 -3915,3148 J5.MH1@-3913,3150 -3873,3110 C13.2@-3780.87,3110 ; C7.2@-3480,2715 C8.2@-3480,2790 C3.2@-3480,2920 C4.2@-3480,2995 -3480,3098.11 U3.9@-3475,3103.11 ; R1.1@-3155,2000.43 -3144.57,2000.43 -3069.57,2075.43 C10.1@-3040,2075.43 C9.1@-3040,2164.57 ; R14.1@-3120,2165 -3040.43,2165 C9.1@-3040,2164.57 ; W4.2@-2845,3275 -2985,3135 v1(-2985,2645) -2785,2645 -2755,2675 -2755,2820 -2790,2855 -2790,3030 -2779.57,3040.43 C5.1@-2735,3040.43 -2720.43,3055 -2544.57,3055 C6.1@-2535,3045.43 ; v1(-2830,2116.85) -2992.28,2116.85 C9.1@-3040,2164.57 ; v1(-2605,2350) -2605,2465 v1(-2600,2470) -2569.13,2500.87 C19.1@-2569.13,2520 ; C14.1@-2600,2270.87 -2480.87,2270.87 C22.1@-2480,2270 -2345,2270 C15.1@-2335,2260 ; v1(-2520,2645) -2520,2610 C17.1@-2530,2600 -2569.13,2560.87 C19.1@-2569.13,2520 ; v1(-2300,2645) -2300,2580 C18.1@-2275,2555 ; v1(-2290,2195) -2335,2240 C15.1@-2335,2260 ; v1(-2225,2565) -2265,2565 C18.1@-2275,2555 ; v1(-2205,1495) -2205,1650 -2135,1720 v1(-2135,1850) -2135,1885 -2118.39,1901.61 U6.4@-2077.4,1901.61 -1961.61,1901.61 -1920,1860 C32.2@-1850,1860 -1849.13,1859.13 C30.2@-1725,1859.13 C28.2@-1615.87,1859.13 ; v1(-1650,1785) -1650,1825 C28.2@-1615.87,1859.13 ; U8.9@-1520,3134.06 -1520,3205 v1(-1375,3350) ; C37.2@-1385,1859.13 -1384.13,1858.27 C35.2@-1260,1858.27 C33.2@-1150.87,1858.27 ; C37.2@-1384.13,1860 C28.2@-1615,1860 C28.2@-1615.87,1859.13 ; v1(-1185,1765) -1185,1824.13 C33.2@-1150.87,1858.27 ; C33.2@-1150,1859.13 C33.2@-1150.87,1858.27 ; v1(-850,3750) -796.18,3803.82 U5.7@-595.87,3803.82 U5.6@-595.87,3753.82 ; W9.1@-820,1998.9 -820,2262.05 S1.1@-812.05,2270 ; v2(-725,3540) -705,3540 -641.18,3603.82 U5.3@-595.87,3603.82 ; C19.1@-2569.13,2520 -2565,2524.13 C21.1@-2450,2524.13 -2445,2529.13 C16.1@-2360,2529.13 ; C16.1@-2360,2529.13 -2335.87,2505 C20.1@-2335.87,2400 -2335,2399.13 C15.1@-2335,2260 ; C16.1@-2360,2529.13 -2300.87,2529.13 C18.1@-2275,2555
  Bottom Layer w30: v1(-4170,2510) -4149.72,2489.72 J2.2@-4149.72,2300 ; J5.MH2@-3913,2540 -3675.17,2302.17 D2.1@-3635,2302.17 -3547.44,2302.17 v1(-3540,2309.61) ; C13.2@-3780.87,3110 v1(-3780.87,3189.13) ; U1.5@-3663.94,1621.14 -3470,1621.14 v1(-3470,1755) U1.3@-3663.94,1755 ; v1(-3530,3115) -3518.11,3103.11 U3.9@-3475,3103.11 ; v1(-3415,2135.39) -3149.61,2135.39 R14.1@-3120,2165 ; W5.2@-2000,3170 -2000,3115 -1975,3090 -1564.06,3090 U8.9@-1525,3129.06 ; P1.2@-1525,2710 v1(-1525,2920) U8.9@-1525,3129.06 ; U8.9@-1520,3134.06 U8.9@-1525,3129.06 ; J8.1@-432.2,1635 -430,1635 -270,1795 ; C23.2@-229.57,3525 -190,3525 -70,3405 -70,2935 C24.1@-365,2640 -270,2545 -270,1795 ; U4.1@-165,1795 -270,1795
GND/U0TX: J8.4 W9.2 | length 342.2
  Bottom Layer w12: J8.4@-845.59,1635 -865,1654.41 -865,1920 -855,1930 W9.2@-820,1930
GPIO4: P2.5 U2.34 | length 4435.3
  Top Layer w12: v1(-2845,2490) -2845,2485 -2825,2485 -2818.74,2478.74 U2.34@-2763.15,2478.74
  Bottom Layer w12: v1(-2845,2490) -2845,2485 -2750,2390 -2750,2075 -3010,1815 -3280,1815 -3395,1700 -3395,1575 -3375,1555 -2390,1555 -2245,1410 -945,1410 -780,1575 -780,1695 -815,1730 P2.5@-815,1775
"INFRA IN": U2.91 U4.3 | length 2361.4
  Top Layer w12: U2.91@-2156.85,2459.06 -2000.94,2459.06 -1990,2470 v1(-175,2470)
  Bottom Layer w12: U4.3@-175,2095 v1(-175,2470)
"INFRA OUT": U2.1 U8.1 U8.2 U8.3 U8.4 | length 1554.4
  Top Layer w12: U2.1@-2223.78,2703.15 -2223.78,2741.22 -2215,2750 -2180,2750 v1(-2150,2720) ; v1(-1995,2720) v1(-1600,2720) ; v1(-1600,2970) v1(-1300,2970)
  Bottom Layer w12: v1(-2150,2720) v1(-1995,2720) ; v1(-1600,2720) v1(-1600,2970) ; v1(-1300,2970) -1270,3000 U8.4@-1270,3134.06 U8.3@-1220,3134.06 U8.2@-1170,3134.06 U8.1@-1120,3134.06
"INFRA OUT0": R23.5 U8.15 | length 126.2
  Top Layer w12: v1(-1270,3440) -1247.99,3440 R23.5@-1227.99,3460
  Bottom Layer w12: v1(-1270,3440) U8.15@-1270,3515.94
"INFRA OUT1": R23.6 U8.16 | length 175.7
  Top Layer w12: v1(-1220,3405) -1196.5,3428.5 R23.6@-1196.5,3460
  Bottom Layer w12: v1(-1220,3405) U8.16@-1220,3515.94
"INFRA OUT2": R23.7 U8.17 | length 168
  Top Layer w12: v1(-1170,3405) -1165,3410 R23.7@-1165,3460
  Bottom Layer w12: v1(-1170,3405) U8.17@-1170,3515.94
"INFRA OUT3": R23.8 U8.18 | length 111.9
  Top Layer w12: R23.8@-1133.5,3460 -1128.5,3455 v1(-1095,3455)
  Bottom Layer w12: U8.18@-1120,3515.94 -1120,3480 v1(-1095,3455)
LED0: U2.25 U3.1 | length 753.1
  Top Layer w12: v1(-3075,2775) -2740,2775 -2696.22,2731.22 U2.25@-2696.22,2703.15
  Bottom Layer w12: v1(-3075,2775) U3.1@-3075,3103.11
LED1: U2.24 U3.2 | length 793.7
  Top Layer w12: v1(-3125,2845) -2770,2845 -2676.54,2751.54 U2.24@-2676.54,2703.15
  Bottom Layer w12: v1(-3125,2845) U3.2@-3125,3103.11
LED2: U2.23 U3.3 | length 860.6
  Top Layer w12: v1(-3175,2875) -2755,2875 -2656.85,2776.85 U2.23@-2656.85,2703.15
  Bottom Layer w12: v1(-3175,2875) U3.3@-3175,3103.11
LED3: U2.22 U3.4 | length 921.7
  Top Layer w12: v1(-3225,2905) -2750,2905 -2637.17,2792.17 U2.22@-2637.17,2703.15
  Bottom Layer w12: v1(-3225,2905) U3.4@-3225,3103.11
LED4: U2.95 U3.5 | length 1840.1
  Top Layer w12: v1(-3255,3040) -2970,3040 -2870,3140 -2355,3140 -2030,2815 -2030,2600 -2092.2,2537.8 U2.95@-2156.85,2537.8
  Bottom Layer w12: U3.5@-3275,3103.11 -3275,3060 v1(-3255,3040)
LED5: U2.96 U3.6 | length 1813.1
  Top Layer w12: v1(-3300,3030) -3280,3010 -2950,3010 -2855,3105 -2360,3105 -2055,2800 -2055,2615 -2112.52,2557.48 U2.96@-2156.85,2557.48
  Bottom Layer w12: U3.6@-3325,3103.11 -3325,3055 v1(-3300,3030)
LED6: U2.99 U3.7 | length 1764
  Top Layer w12: v1(-3355,3030) -3310,2985 -2920,2985 -2830,3075 -2370,3075 -2080,2785 -2080,2640 -2102.78,2617.22 -2156.17,2617.22 U2.99@-2156.85,2616.54
  Bottom Layer w12: U3.7@-3375,3103.11 -3375,3050 v1(-3355,3030)
LED7: U2.100 U3.8 | length 1755.3
  Top Layer w12: v1(-3410,3025) -3335,2950 -2890,2950 -2790,3050 -2385,3050 -2105,2770 -2105,2650 -2118.78,2636.22 U2.100@-2156.85,2636.22
  Bottom Layer w12: U3.8@-3425,3103.11 -3425,3040 v1(-3410,3025)
MISO: J3.7 U2.30 | length 2377.3
  Top Layer w12: v1(-2890,2740) -2890,2620 -2827.48,2557.48 U2.30@-2763.15,2557.48 ; v1(-2195,3165) -2095,3165 -2050,3120 -1500,3120 -1343.46,3276.54 J3.7@-1250,3276.54
  Bottom Layer w12: v1(-2890,2740) -2890,3090 -2815,3165 v1(-2195,3165)
MOSI: J3.3 U2.31 | length 2544.6
  Top Layer w12: v1(-2925,2695) -2925,2590 -2872.02,2537.02 -2795,2537.02 ; v1(-2140,3055) -1420,3055 -1371.69,3103.31 J3.3@-1250,3103.31
  Bottom Layer w12: v1(-2925,2695) -2925,3115 -2835,3205 -2165,3205 -2140,3180 v1(-2140,3055)
NetC5_2: C5.2 U2.17 X1.1 | length 434.6
  Top Layer w12: X1.1@-2636.06,2990 -2538.74,2892.68 U2.17@-2538.74,2703.15
  Bottom Layer w12: C5.2@-2735,2969.57 -2656.5,2969.57 X1.1@-2636.06,2990
NetC6_2: C6.2 U2.16 X1.2 | length 415.4
  Top Layer w12: U2.16@-2519.06,2703.15 -2519.06,2914.88 X1.2@-2443.94,2990
  Bottom Layer w12: C6.2@-2535,2974.57 -2459.37,2974.57 X1.2@-2443.94,2990
NetC9_2: C9.2 U2.48 X2.1 | length 296.1
  Top Layer w12: X2.1@-2920,2196.06 -2912.91,2203.15 U2.48@-2763.15,2203.15
  Bottom Layer w12: C9.2@-3040,2235.43 -2959.37,2235.43 X2.1@-2920,2196.06